# Altium PCB OpenRing-V1R0-Touch.PcbDoc
Units mm, origin at the board's own origin, x right, y up, seen from the top; angles counter-clockwise.
Board outline 51.6 x 6.5 mm, 4 copper layers (Top Layer, Layer 1, Layer 2, Bottom Layer), stack 0.148 mm thick; 7 components, 26 nets, 62 pads, 32 vias.
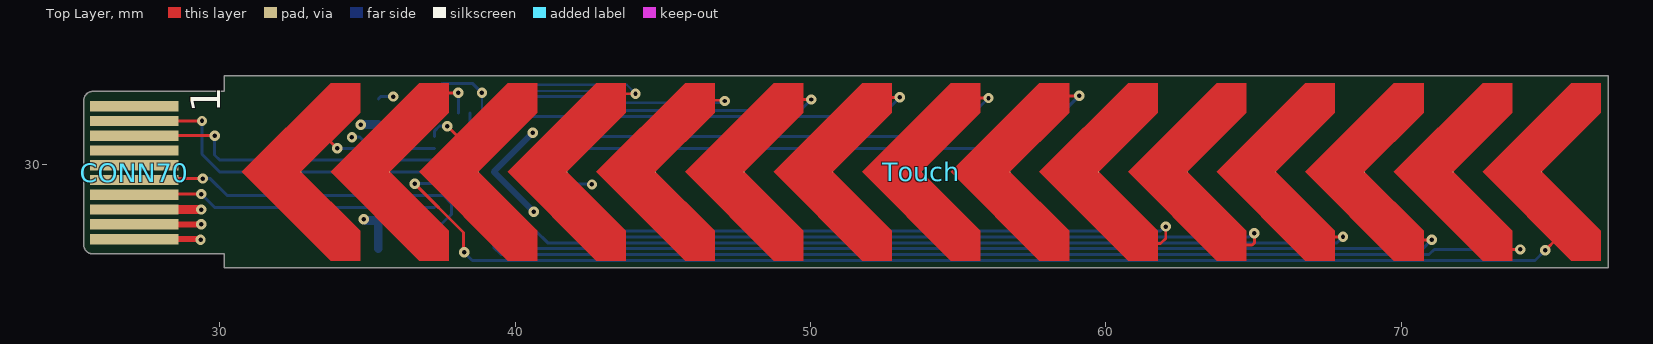
[diagram p0: Top Layer view]
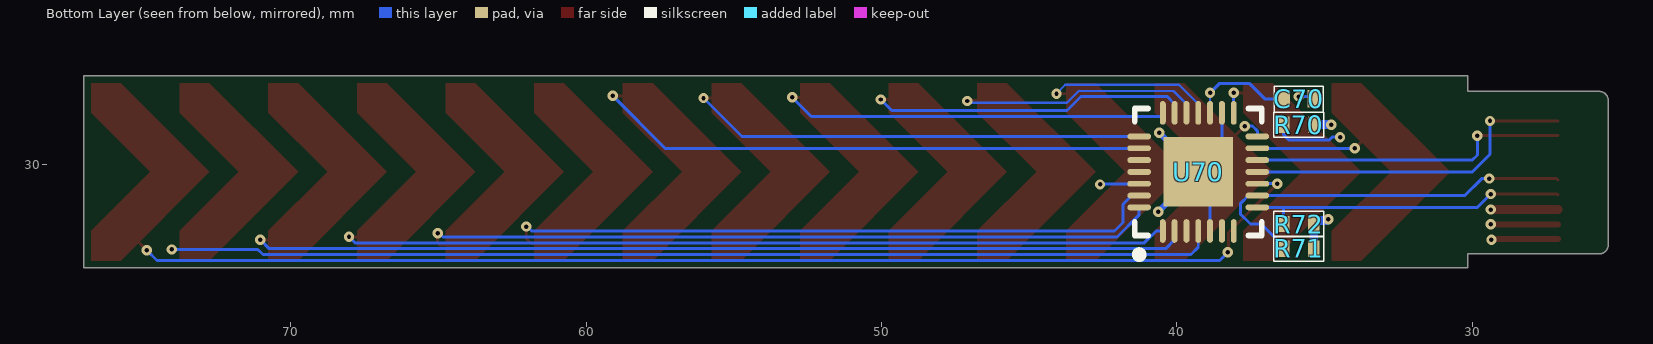
[diagram p1: Bottom Layer view, seen from below]
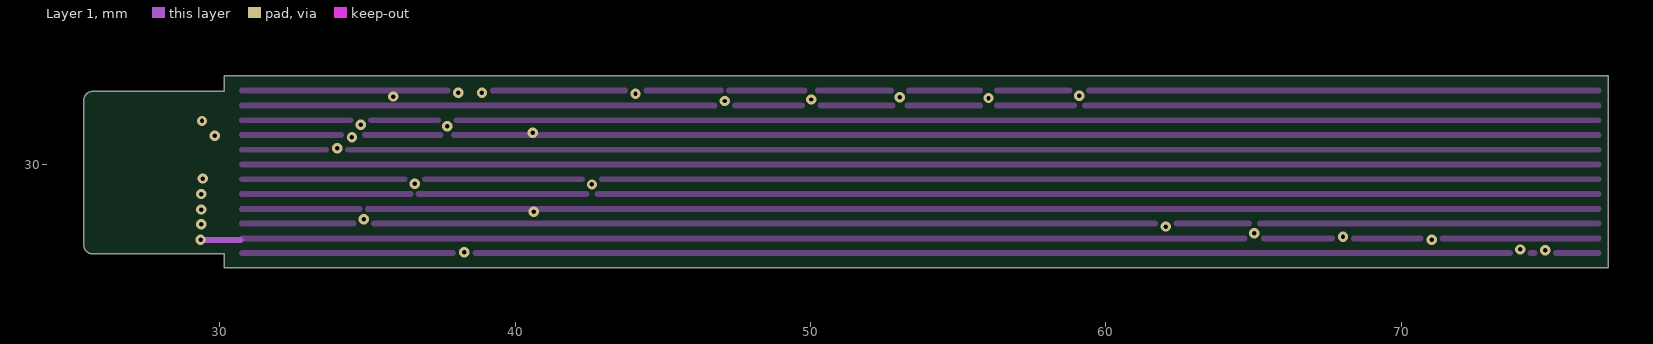
[diagram p2: Layer 1]
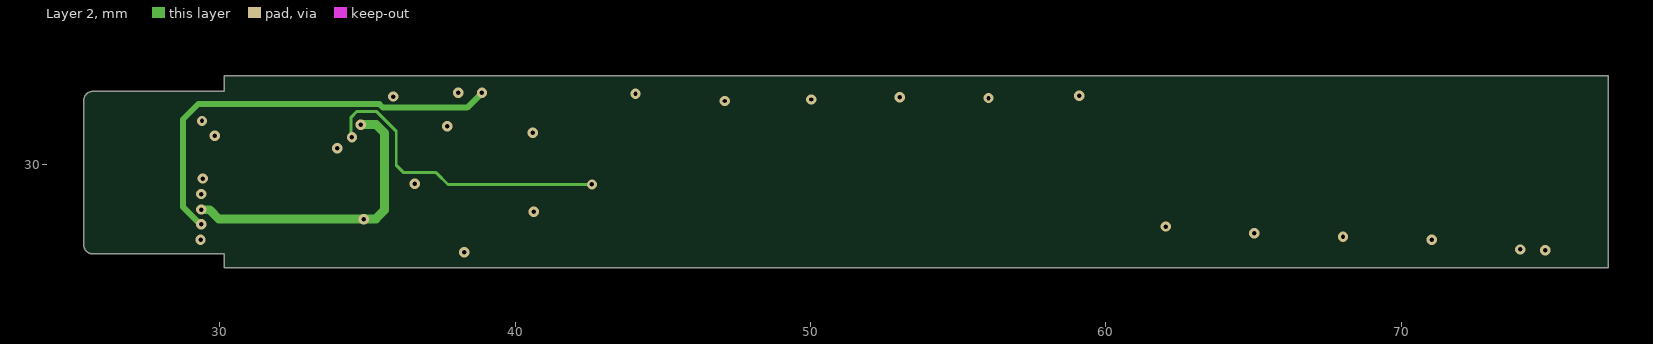
[diagram p3: Layer 2]
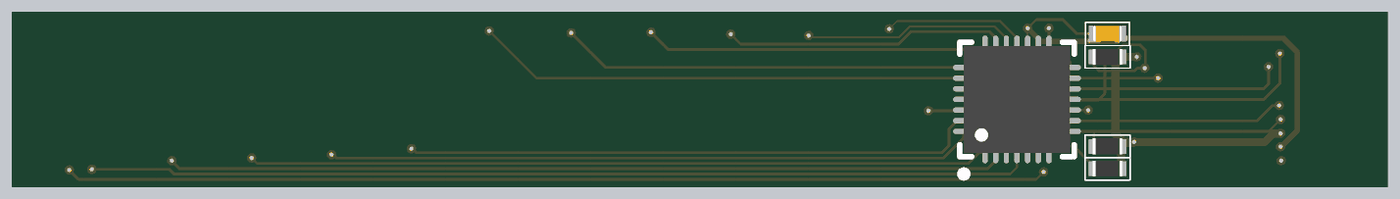
[diagram p4: 3D render of the assembled board from below, using the file's embedded part models]

## Layer stack, top to bottom
Top Solder: solder mask 0.0275, Solder Resist, Dk 2.9
Top Layer: signal copper 0.012
Dielectric 2: prepreg 0.0375, PP-006, Dk 3.3
Layer 1: signal copper 0.012
Dielectric 1: prepreg 0.025, FR-4, Dk 3.3
Layer 2: signal copper 0.012
Dielectric 3: prepreg 0.0375, PP-006, Dk 3.3
Bottom Layer: signal copper 0.012
Bottom Solder: solder mask 0.0275, Solder Resist, Dk 2.9

## Board outline
25.7,26.975 cw(c25.7,27.275) 25.4,27.275 25.4,32.175 cw(c25.7,32.175) 25.7,32.475 30.15,32.475 30.15,33 77,33 77,26.5 30.15,26.5 30.15,26.975

## Design rules (kind name [scope] priority, off if disabled: settings)
AcuteAngle [All] p1: minimum=7.50000000000000E+0001 checktracksonly=FALSE
BoardOutlineClearance [All] p1: gap=0.2 ignorepadtopadclearanceinfootprint=FALSE
Clearance Clearance_BGA [IsTrack vs IsBGA] p1: gap=0.2 ignorepadtopadclearanceinfootprint=FALSE
Clearance [All] p2: gap=0.1 ignorepadtopadclearanceinfootprint=FALSE
ComponentClearance [All] p1: gap=0.1 collisioncheckmode=3 verticalgap=0.1 showdistances=FALSE
MinimumSolderMaskSliver [All] p1: minsoldermaskwidth=0.12
PolygonConnect [All] p1: thpad.connectstyle=Relief thpad.reliefconductorwidth=0.254 thpad.reliefentries=4 thpad.polygonreliefangle="90 Angle" thpad.airgapwidth=0.254 smdpad.connectstyle=Relief smdpad.reliefconductorwidth=0.254 smdpad.reliefentries=4 smdpad.polygonreliefangle="90 Angle" smdpad.airgapwidth=0.254 via.connectstyle=Direct via.reliefconductorwidth=0.254 via.reliefentries=4 via.polygonreliefangle="90 Angle" via.airgapwidth=0.254
RoutingVias [All] p1: holewidth=0.15 width=0.35 viastyle="Through Hole" minholewidth=0.15 minwidth=0.35 maxholewidth=0.711 maxwidth=1.27
SilkToSilkClearance [All] p1: silktosilkclearance=0.1
SilkToSolderMaskClearance [IsPad] p1: minsilkscreentomaskgap=0.1 clearancetoexposedcopper=TRUE
SolderMaskExpansion [All] p1: expansion=0 istentingtop=FALSE
Width Width_50Ohm [IsTrack and HasParameter('Impedance') and HasParameterValue('Impedance', '50')] p1: maxlimit=0.254 minlimit=0.076 preferedwidth=0.254 toplayer_minwidth=0.254 midlayer1_maxwidth=0.076 midlayer1_prefwidth=0.076 midlayer2_maxwidth=0.076 midlayer2_prefwidth=0.076 bottomlayer_minwidth=0.254 minimp=50.000000 maximp=50.000000 favimp=50.000000 checkconnectedcopper=TRUE
Width [All] p2: maxlimit=1 minlimit=0.076 preferedwidth=0.1
26 further rules are at their usual default settings.

## Components (designator, comment, footprint, x,y, rotation, side; value= is the part's Value field where it differs from the comment)
C70 "0.47 uF" CAPC1005X05N 35.875,32.225 r180 bottom
CONN70 "NC" 51281-1098-PCB 26.9,27.475 r0 top
R70 "1.5 k" RESC1005X04N 35.875,31.35 r180 bottom
R71 "1.5 k" RESC1005X04N 35.875,27.15 r180 bottom
R72 "1.5 k" RESC1005X04N 35.875,27.986 r180 bottom
Touch "NC" TOUCH-15CH-LINEAR 50.75,29.75 r0 top
U70 "MTCH6102-I/MV" QFN40P400X400X55_HS-29N 39.275,29.75 r90 bottom

## Footprints (in the part's own frame and the unit in brackets; to place one, negate y for a bottom-side part, rotate by r counter-clockwise, add the part's x,y. Pads: shape width x height; smd on the part's side, far side on the other; paste and mask are expansions set on the pad)
51281-1098-PCB [mm]
  rect 3x0.35 smd paste-400 mask+0: 1(0.2,0) 2(0.2,0.5) 3(0.2,1) 4(0.2,1.5) 5(0.2,2) 6(0.2,2.5) 7(0.2,3) 8(0.2,3.5) 9(0.2,4) 10(0.2,4.5)
CAPC1005X05N [mm] "Chip Capacitor, 2-Leads, Body 1.00x0.50mm, IPC Medium Density"
  rect 0.4x0.6 smd mask+0.04: 1(-0.5,0) 2(0.5,0)
  silkscreen extent -0.82,-0.45 0.82,0.43, body extent -0.55,-0.3 0.55,0.3, height 0.6
QFN40P400X400X55_HS-29N [mm] "QFN, 28-Leads, Body 4.00x4.00mm, Pitch 0.40mm, Thermal Pad 2.35x2.35mm, IPC Medium Density"
  oval 0.8x0.2 smd: 1(-2,1.2) 2(-2,0.8) 3(-2,0.4) 4(-2,0) 5(-2,-0.4) 6(-2,-0.8) 7(-2,-1.2) 15(2,-1.2) 16(2,-0.8) 17(2,-0.4) 18(2,0) 19(2,0.4) 20(2,0.8) 21(2,1.2)
  oval 0.2x0.8 smd: 8(-1.2,-2) 9(-0.8,-2) 10(-0.4,-2) 11(0,-2) 12(0.4,-2) 13(0.8,-2) 14(1.2,-2) 22(1.2,2) 23(0.8,2) 24(0.4,2) 25(0,2) 26(-0.4,2) 27(-0.8,2) 28(-1.2,2)
  rect 2.35x2.35 smd: 29(0,0)
  silkscreen extent -2.92,-2.15 2.15,2.15, body extent -2.01,-2.01 2.01,2.01, height 0.55
RESC1005X04N [mm] "Chip Resistor, 2-Leads, Body 1.00x0.50mm, IPC Medium Density"
  rect 0.4x0.55 smd: 1(-0.51,0) 2(0.51,0)
  silkscreen extent -0.85,-0.43 0.85,0.43, body extent -0.55,-0.3 0.55,0.3, height 0.6
TOUCH-15CH-LINEAR [mil]
  round 1 smd paste-15748 mask-15748: 1(-708.66,0) 2(-590.55,0) 3(-472.44,0) 4(-354.33,0) 5(-236.22,0) 6(-118.11,0) 7(0,0) 8(118.11,0) 9(236.22,0) 10(354.33,0) 11(472.44,0) 12(590.55,0) 13(708.66,0) 14(826.77,0) 15(944.88,0)
  Top Layer region: -669.29,-118.11 -787.4,0 -669.29,118.11 -629.92,118.11 -629.92,78.74 -708.66,0 -629.92,-78.74 -629.92,-118.11
  Top Layer region: -551.18,-118.11 -669.29,0 -551.18,118.11 -511.81,118.11 -511.81,78.74 -590.55,0 -511.81,-78.74 -511.81,-118.11
  Top Layer region: -433.07,-118.11 -551.18,0 -433.07,118.11 -393.7,118.11 -393.7,78.74 -472.44,0 -393.7,-78.74 -393.7,-118.11
  Top Layer region: -314.96,-118.11 -433.07,0 -314.96,118.11 -275.59,118.11 -275.59,78.74 -354.33,0 -275.59,-78.74 -275.59,-118.11
  Top Layer region: -196.85,-118.11 -314.96,0 -196.85,118.11 -157.48,118.11 -157.48,78.74 -236.22,0 -157.48,-78.74 -157.48,-118.11
  Top Layer region: -78.74,-118.11 -196.85,0 -78.74,118.11 -39.37,118.11 -39.37,78.74 -118.11,0 -39.37,-78.74 -39.37,-118.11
  Top Layer region: 39.37,-118.11 -78.74,0 39.37,118.11 78.74,118.11 78.74,78.74 0,0 78.74,-78.74 78.74,-118.11
  Top Layer region: 275.59,-118.11 157.48,0 275.59,118.11 314.96,118.11 314.96,78.74 236.22,0 314.96,-78.74 314.96,-118.11
  Top Layer region: 393.7,-118.11 275.59,0 393.7,118.11 433.07,118.11 433.07,78.74 354.33,0 433.07,-78.74 433.07,-118.11
  Top Layer region: 511.81,-118.11 393.7,0 511.81,118.11 551.18,118.11 551.18,78.74 472.44,0 551.18,-78.74 551.18,-118.11
  Top Layer region: 629.92,-118.11 511.81,0 629.92,118.11 669.29,118.11 669.29,78.74 590.55,0 669.29,-78.74 669.29,-118.11
  Top Layer region: 748.03,-118.11 629.92,0 748.03,118.11 787.4,118.11 787.4,78.74 708.66,0 787.4,-78.74 787.4,-118.11
  Top Layer region: 866.14,-118.11 748.03,0 866.14,118.11 905.51,118.11 905.51,78.74 826.77,0 905.51,-78.74 905.51,-118.11
  Top Layer region: 984.25,-118.11 866.14,0 984.25,118.11 1023.62,118.11 1023.62,78.74 944.88,0 1023.62,-78.74 1023.62,-118.11
  Top Layer region: 157.48,-118.11 39.37,0 157.48,118.11 196.85,118.11 196.85,78.74 118.11,0 196.85,-78.74 196.85,-118.11

## Part data
C70: library part GRM155R61A474KE15D, "CAP CER 0.47UF 10V X5R 0402", Capacitance=0.47µF, Manufacturer="Murata Electronics North America", Operating Temperature="-55°C ~ 85°C", Package / Case="0402 (1005 Metric)", Ratings=-, Supplier Part Number 1=490-3264-6-ND, Temperature Coefficient=X5R, Tolerance=±10%, Voltage - Rated=10V, Applications="General Purpose", Category=Capacitors, ComponentLink1Description=http://www.murata.com/~/media/webrenewal/support/library/catalog/products/capacitor/mlcc/c02e.pdf, ComponentLink1URL=http://www.murata.com/~/media/webrenewal/support/library/catalog/products/capacitor/mlcc/c02e.pdf, Features=-, Height - Seated (Max)=-, Lead Spacing=-, Lead Style=-, Manufacturer Part Number=GRM155R61A474KE15D, Mounting Type="Surface Mount, MLCC", Packaging=Digi-Reel®, Part Status=Active, Pricing 1="1=0.08, 10=0.054, 50=0.029, 100=0.0246, 250=0.02008, 500=0.01718, 1000=0.01339, 5000=0.01116 (GBP)", RoHS="RoHS Compliant", Size / Dimension="0.039\" L x 0.020\" W (1.00mm x 0.50mm)", Stock 1=715573, Supplier 1=Digi-Key, Thickness (Max)="0.022\" (0.55mm)"
CONN70: library part 51281-1098-PCB, System=Connector
R70 R71 R72: library part ERJ-2RKF1501X, "RES SMD 1.5K OHM 1% 1/10W 0402", Manufacturer="Panasonic Electronic Components", Operating Temperature="-55°C ~ 155°C", Package / Case="0402 (1005 Metric)", Power (Watts)="0.1W, 1/10W", Resistance (Ohms)=1.5k, Supplier Device Package=0402, Supplier Part Number 1=P1.50KLDKR-ND, Temperature Coefficient=±100ppm/°C, Tolerance=±1%, Category=Resistors, ComponentLink1Description=https://industrial.panasonic.com/cdbs/www-data/pdf/RDA0000/AOA0000C283.pdf, ComponentLink1URL=https://industrial.panasonic.com/cdbs/www-data/pdf/RDA0000/AOA0000C283.pdf, Composition="Thick Film", Failure Rate=-, Features="Automotive AEC-Q200", Height - Seated (Max)="0.016\" (0.40mm)", Manufacturer Part Number=ERJ-2RKF1501X, Number of Terminations=2, Packaging=Digi-Reel®, Part Status=Active, Pricing 1="1=0.1, 10=0.025, 25=0.018, 50=0.0136, 100=0.01, 250=0.00764, 500=0.00612, 1000=0.00451, 5000=0.00323 (USD)", RoHS="RoHS Compliant", Size / Dimension="0.039\" L x 0.020\" W (1.00mm x 0.50mm)", Stock 1=1349197, Supplier 1=Digi-Key
Touch: library part Touch-15Ch-Linear
U70: "Capacitive Touch Screen Automotive 28-Pin UQFN EP Tube", Manufacturer=Microchip, Supplier Part Number=MTCH6102-I/MV-ND, Category="Touch Screen Controllers", Checked=FALSE, ComponentLink1Description=https://datasheet.ciiva.com/29355/filehandler-aspxddocname-en568912-29355091.pdf?src-supplier=Digikey, ComponentLink1URL=https://datasheet.ciiva.com/29355/filehandler-aspxddocname-en568912-29355091.pdf?src-supplier=Digikey, ComponentLink2Description=https://datasheet.ciiva.com/48495/40001750a-48495606.pdf?src-supplier=Avnet, ComponentLink2URL=https://datasheet.ciiva.com/48495/40001750a-48495606.pdf?src-supplier=Avnet, ComponentLink3Description=https://datasheet.ciiva.com/46405/1810724-46405963.pdf?src-supplier=Element14, ComponentLink3URL=https://datasheet.ciiva.com/46405/1810724-46405963.pdf?src-supplier=Element14, Manufacturer Part Number=MTCH6102-I/MV, Pricing="1=1.95, 25=1.8, 100=1.62 (USD)", RoHS=Yes, Stock=496, Supplier=Digikey, Supplier 1=Digikey, Supplier 2=Mouser, Supplier Part Number 1=MTCH6102-I/MV-ND, Supplier Part Number 2=579-MTCH6102-I/MV

## Via types
v1: diameter 0.35, hole 0.15, Top Layer to Bottom Layer, tented both sides, 32 vias

## Nets (pads, with @x,y where several pads share a name; then routed paths per layer and width w, separated by ;. In a path a pad name is that pad's centre, name@x,y a point inside that pad or via, vN(x,y) a via of type N, cw(c..) or ccw(c..) an arc to the next point about the centre after c; other vN are vias at no path point)
1V8: CONN70.3 R70.2 R71.2 R72.2 | length 14.2
  Top Layer w0.3: CONN70.3 v1@29.35,28.475
  Layer 2 w0.3: v1(29.375,28.475) 29.379,28.471 29.654,28.471 29.975,28.15 v1(34.875,28.15) ; v1(34.775,31.35) 35.3,31.35 35.575,31.075 35.575,28.45 35.285,28.16 v1@34.885,28.16
  Bottom Layer w0.3: v1(34.775,31.35) R70.2 ; v1(34.875,28.15) 34.889,28.15 34.928,28.111 35.315,28.111 35.365,28.061 R72.2 ; R71.2 R72.2@35.365,27.965
CH_0: Touch.1 U70.13 | length 4.1
  Top Layer w0.1: 33.325,30.8 33.725,30.8 v1(33.975,30.55)
  Bottom Layer w0.1: v1(33.975,30.55) U70.13
CH_1: Touch.3 U70.14 | length 1.6
  Top Layer w0.1: v1(37.7,31.3) 38.225,30.775 38.425,30.775
  Bottom Layer w0.1: U70.14 37.275,31.14 37.435,31.3 v1(37.7,31.3)
CH_2: Touch.2 U70.15 | length 1.5
  Top Layer w0.1: 37.225,32.375 37.275,32.425 v1(38.075,32.425)
  Bottom Layer w0.1: U70.15 v1(38.075,32.425)
CH_3: Touch.4 U70.18 | length 6.7
  Top Layer w0.076: 42.9,32.35 42.95,32.4 v1(44.075,32.4)
  Bottom Layer w0.076: U70.18 39.275,32.05 39.925,32.7 43.775,32.7 v1(44.075,32.4)
CH_4: Touch.5 U70.19 | length 8.9
  Top Layer w0.076: 46.275,32.175 47.075,32.175 v1(47.1,32.15)
  Bottom Layer w0.076: U70.19 39.675,32.05 40.113,32.488 43.319,32.488 43.72,32.087 46.963,32.087 47.026,32.15 v1(47.1,32.15)
CH_5: Touch.6 U70.20 | length 11.8
  Top Layer w0.1: 48.9,32.2 v1(50.025,32.2)
  Bottom Layer w0.1: U70.20 40.075,32.05 40.325,32.3 43.241,32.3 43.716,31.825 49.65,31.825 v1(50.025,32.2)
CH_6: Touch.7 U70.21 | length 13.9
  Top Layer w0.1: 52.075,32.325 52.491,32.325 52.541,32.275 v1(53.025,32.275)
  Bottom Layer w0.1: U70.21 40.475,31.671 40.521,31.625 52.375,31.625 v1(53.025,32.275)
CH_7: Touch.8 U70.22 | length 16.1
  Top Layer w0.1: 55.275,32.325 55.35,32.25 v1(56.025,32.25)
  Bottom Layer w0.1: U70.22 54.725,30.95 v1(56.025,32.25)
CH_8: Touch.9 U70.23 | length 19.8
  Top Layer w0.1: 57.925,32.275 57.975,32.325 v1(59.1,32.325)
  Bottom Layer w0.1: U70.23 57.325,30.55 v1(59.1,32.325)
CH_9: Touch.10 U70.27 | length 23.1
  Top Layer w0.1: 61.125,27.325 61.85,27.325 62.025,27.5 v1(62.025,27.9)
  Bottom Layer w0.1: U70.27 41.548,28.95 41.625,28.873 41.625,28.854 41.825,28.654 41.825,28.033 42.108,27.75 61.841,27.75 61.991,27.9 v1(62.025,27.9)
CH_10: Touch.11 U70.28 | length 25.6
  Top Layer w0.1: 64.125,27.275 64.95,27.275 65.025,27.35 v1(65.025,27.675)
  Bottom Layer w0.1: U70.28 41.275,28.3 42.025,27.55 64.841,27.55 64.966,27.675 v1(65.025,27.675)
CH_11: Touch.12 U70.1 | length 28.8
  Top Layer w0.1: 67.05,27.6 67.1,27.55 v1(68.025,27.55)
  Bottom Layer w0.1: U70.1 40.7,27.75 41.1,27.35 67.825,27.35 v1(68.025,27.55)
CH_12: Touch.13 U70.2 | length 32.3
  Top Layer w0.1: 70.225,27.5 70.275,27.45 v1(71.025,27.45)
  Bottom Layer w0.1: U70.2 40.075,27.45 40.375,27.15 70.725,27.15 v1(71.025,27.45)
CH_13: Touch.14 U70.4 | length 36.2
  Top Layer w0.1: 73.3,27.175 73.35,27.125 v1(74.025,27.125)
  Bottom Layer w0.1: U70.4 39.275,27.2 39.525,26.95 70.94,26.95 71.115,27.125 v1(74.025,27.125)
CH_14: Touch.15 U70.10 | length 41.3
  Top Layer w0.1: v1(36.6,29.35) 38.25,27.7 v1@38.25,26.975 ; v1(74.875,27.1) 75.25,27.475 75.25,27.7
  Bottom Layer w0.1: v1(36.6,29.35) U70.10 ; v1(38.275,27.025) 38.55,26.75 74.525,26.75 v1(74.875,27.1)
GND: C70.2 CONN70.1 U70.5 U70.16 U70.29 | length 10.3
  Top Layer w0.2: CONN70.1 v1@29.4,27.475
  Layer 1 w0.2: v1(29.35,27.45) 30.7,27.45
  Bottom Layer w0.1: C70.2 35.45,32.3 v1(35.875,32.3) ; U70.29@38.425,30.7 38.475,30.75 U70.16 ; U70.5 38.875,28.95 U70.29@38.925,29
  Bottom Layer w0.2: v1(40.6,31.075) U70.29 v1(40.625,28.4)
GPIO_0: CONN70.7
GPIO_1: CONN70.6
GPIO_2: CONN70.5 R71.1 U70.9 | length 13.5
  Top Layer w0.1: CONN70.5 27.15,29.525 v1(29.425,29.525) v1@29.45,29.5
  Bottom Layer w0.1: v1(29.425,29.525) 29.43,29.52 29.68,29.52 30.25,28.95 37.575,28.95 37.85,28.675 37.85,28.328 37.508,27.986 37.146,27.986 36.385,27.225 R71.1
GPIO_3: CONN70.4 R72.1 U70.8 | length 11
  Top Layer w0.1: CONN70.4 27.125,29 v1(29.375,29) v1@29.4,29
  Bottom Layer w0.1: v1(29.375,29) 29.825,28.55 36.385,28.55 ; R72.1 36.385,28.55 ; U70.8 36.385,28.55
NetR70_1: R70.1 U70.26 | length 14.3
  Layer 2 w0.1: v1(34.475,30.925) 34.45,30.95 34.45,31.6 34.65,31.8 35.3,31.8 35.975,31.125 35.975,29.975 36.225,29.725 37.325,29.725 37.725,29.325 v1(42.6,29.325)
  Bottom Layer w0.1: v1(34.475,30.925) 34.75,30.925 34.85,30.825 36.2,30.825 36.385,31.01 R70.1 ; U70.26 41.288,29.338 42.588,29.338 v1(42.6,29.325)
SCL: CONN70.9 U70.11 | length 11.5
  Top Layer w0.1: CONN70.9 v1(29.4,31.475)
  Bottom Layer w0.1: v1(29.4,31.475) 29.4,30.35 30,29.75 U70.11
SDA: CONN70.8 U70.12 | length 10.9
  Top Layer w0.1: CONN70.8 v1(29.825,30.975) v1@29.85,30.975
  Bottom Layer w0.1: v1(29.825,30.975) 29.825,30.325 30,30.15 U70.12
V_REG_IO: C70.1 CONN70.2 U70.17 | length 20.3
  Top Layer w0.2: CONN70.2 v1(29.375,27.975)
  Layer 2 w0.2: v1(29.375,27.975) 29.345,27.975 28.75,28.57 28.75,31.525 29.275,32.05 35.404,32.05 35.529,31.925 38.375,31.925 38.85,32.4 v1@38.9,32.4
  Bottom Layer w0.076: U70.17 v1(38.875,32.425)
  Bottom Layer w0.1: C70.1 37.025,32.225 37.55,32.75 38.55,32.75 38.85,32.45 v1@38.9,32.45
V_SYS: CONN70.10
pads on no net: U70.3 U70.6 U70.7 U70.24 U70.25

## Polygon pours and split planes (outlines as drawn)
GND on Layer 1 "GND_L02_P000" (hatched Horizontal grid 0.5 track 0.2, pour order 0): 30.75,32.75 76.75,32.75 76.75,26.75 30.75,26.75

## Silkscreen, mask and mechanical layers (free items; w line width, h text height)
Board:
  the board outline again, w0.1
Top Assembly:
  lines w0.1: 25.4,24.3 25.4,34.3 ; 30.2,24.55 30.2,33.875 ; 35.675,34.125 35.7,24.35 ; 41.9,23.675 41.9,33.675 ; 41.9,24.525 41.9,34.825 ; 77,22.975 77,34.75

## Dimensions
25.4,34.3 to 77,34.75 on Board Shape
30.15,26.5 to 30.15,33 on Board Shape
25.4,34.3 to 41.9,33.675 on Board Shape
25.4,24.3 to 30.2,24.55 on Board Shape
35.675,34.125 to 41.975,24.5 on Board Shape
30.2,33.875 to 35.7,24.35 on Board Shape

## Text inside footprints (layer, text, board x,y; h text height)
CONN70: Top Overlay "1" at 30.025,31.761 h1 r90; Fab Notes "Stiffner" at 26.15,25.975 h0.4